# EAGLE board fuenteSimetrica2 (EAGLE 7.5.0)

Size 100 x 80 mm. Coordinates in mm from the lower left corner, seen from the top.
Outline: 0,0 100,0 100,80 0,80 0,0
Copper layers (1*16): Top 0.035mm / dielectric 1.5mm / Bottom 0.035mm
Design rules "default": minimum track width 10mil, minimum drill 24mil, track to track 8mil, track to pad 8mil, pad to pad 8mil, via to via 8mil, smd to smd 8mil, copper to edge 40mil, drill to drill 8mil, minimum pad ring 10mil, minimum via ring 8mil, stop-mask expansion 4mil, vias tented up to drill 0mil, thermal gap 10mil
Net classes: 0 fina: width 0.508 mm; 1 mediana: width 1.27 mm; 2 gruesa: width 2.54 mm

## Footprints (pad centres in the part's own frame; a part is rotated, then mirrored left to right if it is on the bottom)
E3,5-8 = drill 0.813 pad 1.6: + -1.778,0 | drill 0.813 pad 1.6 octagon: - 1.778,0
E2,5-6 = drill 0.813 pad 1.6: + -1.27,0 | drill 0.813 pad 1.6 octagon: - 1.27,0
C050-030X075 = drill 0.813 octagon: 1 -2.54,0; 2 2.54,0
DO41-10 = drill 1.118: A 5.08,0; C -5.08,0
AK500/3-H = drill 1.321 long: 1 -5.004,0; 2 0,0; 3 5.004,0
TO220H = drill 1.118 long: 1 -2.54,-10.16; 2 0,-10.16; 3 2.54,-10.16 | hole 3.302: 0,4.826
LED5MM = drill 0.813 octagon: A -1.27,0; K 1.27,0
RS3 = drill 0.813 long: A -2.54,2.54; E 2.54,2.54; S 0,-2.54
0207/10 = drill 0.813 octagon: 1 -5.08,0; 2 5.08,0

## Placement (x,y rotation side)
C1  1000uF  [E3,5-8]  17.78,73.66 90 top
C2  1000uF  [E3,5-8]  16.51,8.89 90 top
C3  1uF  [E2,5-6]  45.72,36.83 180 top
C4  1uF  [E2,5-6]  74.93,36.83 180 top
C5  10nF  [C050-030X075]  5.08,64.77 270 top
C6  10nF  [C050-030X075]  5.08,10.16 270 top
C7  10uF  [E2,5-6]  55.88,36.83 180 top
C8  10uF  [E2,5-6]  64.77,36.83 180 top
D1  1N4004  [DO41-10]  33.02,60.96 0 top
D2  1N4004  [DO41-10]  17.78,60.96 0 top
D3  1N4004  [DO41-10]  33.02,54.61 0 top
D4  1N4004  [DO41-10]  17.78,54.61 0 top
ENTRADA  [AK500/3-H]  6.35,43.18 90 top
IC1  317T  [TO220H]  64.77,69.85 0 top
IC2  337T  [TO220H]  52.07,69.85 0 top
LED1  +vcc  [LED5MM]  38.1,73.66 0 top
LED2  -vcc  [LED5MM]  34.29,30.48 90 top
R1  10KOhm  [RS3]  54.61,7.62 0 top
R2  470KOhm  [RS3]  67.31,7.62 0 top
R3  470KOhm  [RS3]  92.71,7.62 0 top
R4  10KOhm  [RS3]  80.01,7.62 0 top
R5  220Ohm  [0207/10]  50.8,45.72 0 top
R6  220Ohm  [0207/10]  22.86,43.18 270 top
R7  330Ohm  [0207/10]  27.94,68.58 0 top
R8  330Ohm  [0207/10]  69.85,45.72 180 top
SALIDA  [AK500/3-H]  91.44,41.91 90 top

## Library data of the parts
C1-C8 R5-R8 = rcl
D1-D4 = diode
ENTRADA SALIDA = con-ptr500; OC_FARNELL: unknown; OC_NEWARK: unknown
IC1 IC2 = linear
LED1 LED2 = led
R1-R4 = pot

## Nets
GND: C1.- C2.+ C2.- C3.- C4.+ C5.2 C6.1 C6.2 C7.- C8.+ D3.A D4.A ENTRADA.2 IC2.2 LED1.K LED2.A R2.E R3.E R8.1
N$1: D1.A D3.C ENTRADA.1
N$2: C1.+ C5.1 D1.C D2.C IC1.3 R7.2
N$3: D2.A D4.C ENTRADA.3
N$4: LED1.A R7.1
N$5: C7.+ IC1.2 R5.2 SALIDA.1
N$7: R1.E R2.S
N$8: LED2.K R8.2
N$9: C3.+ IC1.1 R1.S R5.1
N$10: C4.- IC2.1 R4.S R6.2
N$11: R3.S R4.E
N$12: C8.- IC2.3 R6.1 SALIDA.3

## Tracks (layer width: path | path; a pad name or v marks a point on that pad's centre or on a via)
GND  (18 unrouted)
N$1  (2 unrouted)
N$2  (5 unrouted)
N$3  (2 unrouted)
N$4  (1 unrouted)
N$5  (3 unrouted)
N$7  (1 unrouted)
N$8  (1 unrouted)
N$9  (3 unrouted)
N$10  (3 unrouted)
N$11  (1 unrouted)
N$12  (3 unrouted)